# Altium PCB USB_C_programmer_board.PcbDoc
Units mm, origin at the board's own origin, x right, y up, seen from the top; angles counter-clockwise.
Board outline 24.98 x 15 mm, 2 copper layers (Top Layer, Bottom Layer), stack 1.571 mm thick; 6 components, 7 nets, 30 pads, 2 vias.
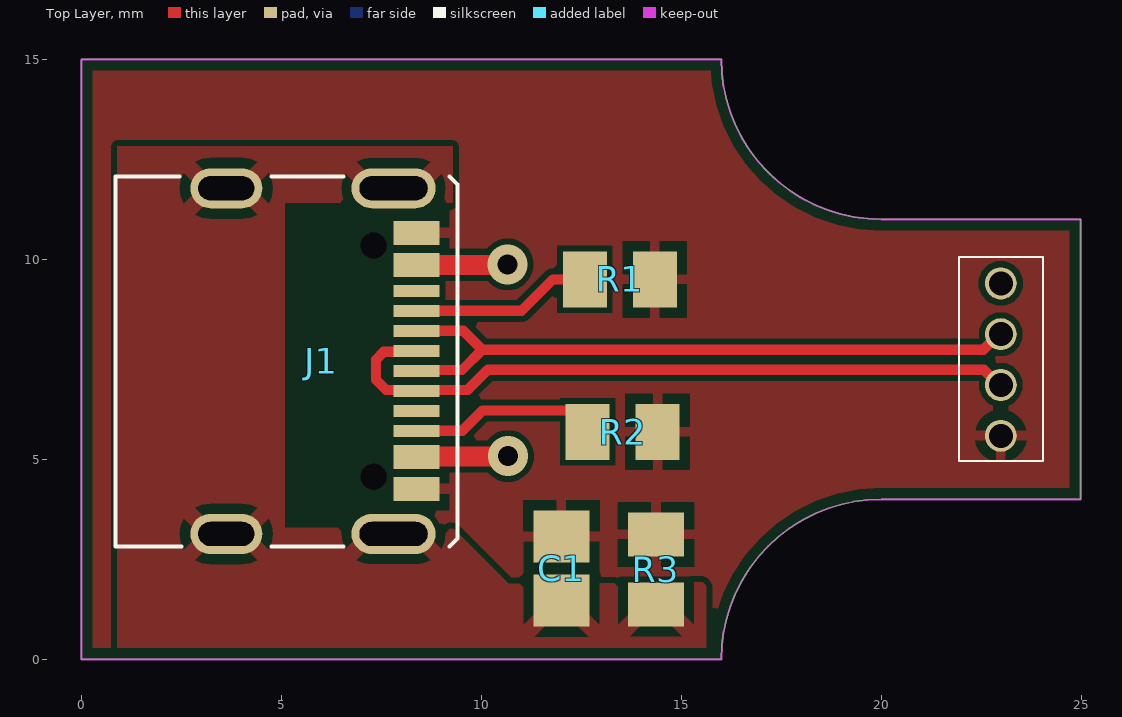
[diagram p0: Top Layer view]
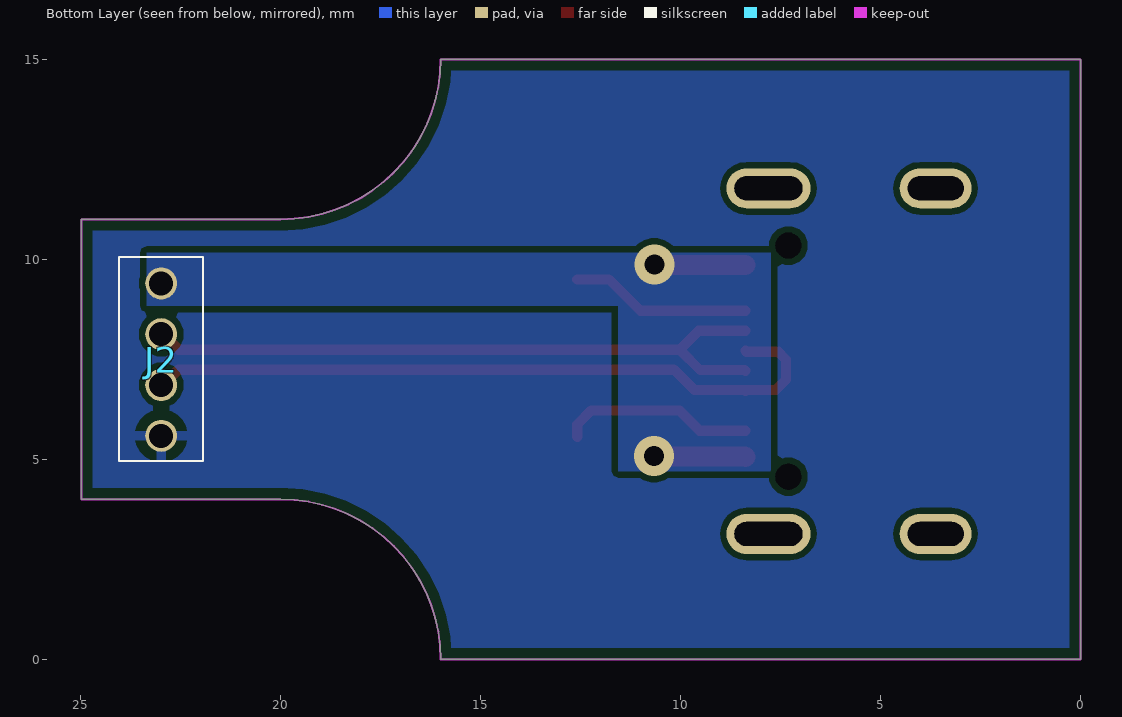
[diagram p1: Bottom Layer view, seen from below]
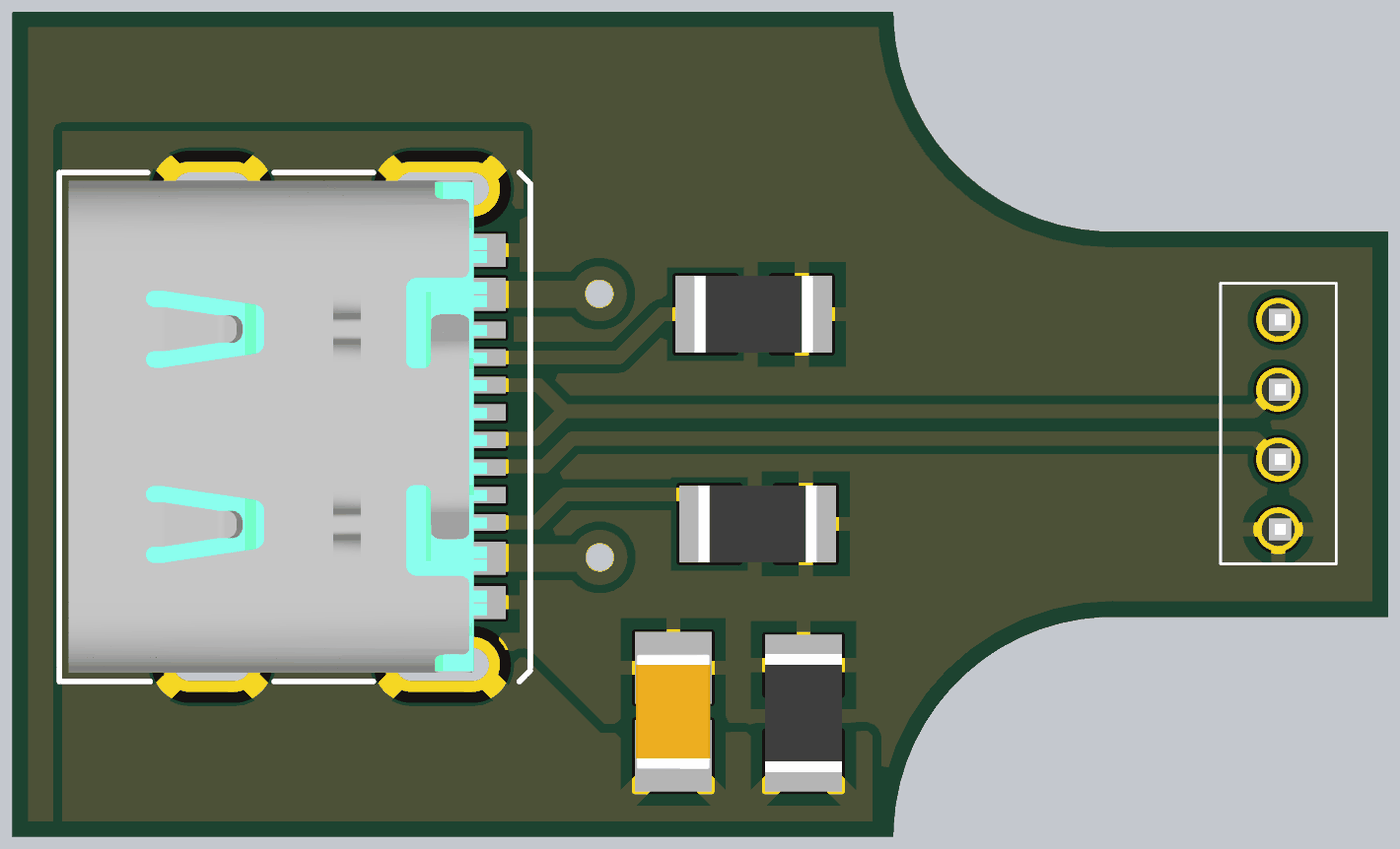
[diagram p2: 3D render of the assembled board from above, using the file's embedded part models]

## Layer stack, top to bottom
Top Solder: solder mask 0.0102, Solder Resist, Dk 3.5
Top Layer: signal copper 0.0356
Dielectric 1: dielectric 1.5, FR-4, Dk 4.8
Bottom Layer: signal copper 0.0356
Bottom Solder: solder mask 0.0102, Solder Resist, Dk 3.5

## Board outline
0,0 0,14.986 0.014,15 16,15 ccw(c20,15) 20,11 24.984,11 24.984,4 20,4 ccw(c20,0) 16,0

## Design rules (kind name [scope] priority, off if disabled: settings)
Clearance Clearance_1 [OnMid vs OnMid] p1: gap=0.15 ignorepadtopadclearanceinfootprint=FALSE except(0.2: Arc-Arc Arc-Track Arc-Text Track-Track Track-Text Text-Text; 0.254: Hole-Hole) sourcerule=45 cellrowname=All cellrowtype=0 cellcolname=All cellcoltype=0 innerlayers=TRUE
Clearance Clearance_2 [(ExistsOnLayer('Top Layer') Or ExistsOnLayer('Bottom Layer')) vs (ExistsOnLayer('Top Layer') Or ExistsOnLayer('Bottom Layer'))] p2: gap=0.15 ignorepadtopadclearanceinfootprint=FALSE except(0.2: Arc-Arc Arc-Track Arc-Text Track-Track Track-Text Text-Text; 0.254: Hole-Hole) sourcerule=45 cellrowname=All cellrowtype=0 cellcolname=All cellcoltype=0 outerlayers=TRUE
Clearance [All] p3: gap=0.254 ignorepadtopadclearanceinfootprint=FALSE ismatrix=TRUE
MinimumSolderMaskSliver [All] p1: minsoldermaskwidth=0
PolygonConnect PolygonConnectStyle_3 [isVia] p1: connectstyle=Direct reliefconductorwidth=0.254 reliefentries=2 polygonreliefangle="0 Angle" airgapwidth=0.254
PolygonConnect PolygonConnectStyle_2 [IsNamedPolygon('5V_BOTTOM')] p2: connectstyle=Direct reliefconductorwidth=0.254 reliefentries=2 polygonreliefangle="0 Angle" airgapwidth=0.254
PolygonConnect PolygonConnectStyle_1 [IsNamedPolygon('EARTH_POUR')] p3: connectstyle=Relief reliefconductorwidth=0.4 reliefentries=4 polygonreliefangle="45 Angle" airgapwidth=0.254
PolygonConnect [All] p4: connectstyle=Relief reliefconductorwidth=0.254 reliefentries=4 polygonreliefangle="90 Angle" airgapwidth=0.254
RoutingVias RoutingViaStyle_1 [All] p1: holewidth=0.5 width=1 viastyle="Through Hole" minholewidth=0.3 minwidth=0.6 maxholewidth=1 maxwidth=2
RoutingVias [All] p2: holewidth=0.711 width=1.27 viastyle="Through Hole" minholewidth=0.711 minwidth=1.27 maxholewidth=0.711 maxwidth=1.27
SilkToSolderMaskClearance [IsPad] p1: minsilkscreentomaskgap=0 clearancetoexposedcopper=TRUE
SolderMaskExpansion SolderMaskExpansion_1 [IsVia] p1: expansion=0.102 istentingtop=TRUE useseparateexpansions=TRUE expansionbottom=0.102 istentingbottom=TRUE
SolderMaskExpansion [All] p2: expansion=0.05 istentingtop=FALSE
SupplyNets "Schematic Supply Nets_2" [InNet('5V')] p1: voltage=0.000
SupplyNets "Schematic Supply Nets_1" [InNet('Earth')] p2: voltage=0.000
SupplyNets "Schematic Supply Nets" [InNet('GND')] p3: voltage=0.000
Width MaxMinWidth_1 [All] p1: maxlimit=3 minlimit=0.15 preferedwidth=0.2 minimp=50.000000 maximp=50.000000 favimp=50.000000
Width [All] p2: maxlimit=0.254 minlimit=0.254 preferedwidth=0.254
28 further rules are at their usual default settings.

## Components (designator, comment, footprint, x,y, rotation, side; value= is the part's Value field where it differs from the comment)
C1 "C_0805_0.1uF" CAP_0805 12.002,2.274 r90 top
J1 "USB_C_CONNECTOR" USB_C_CONNECTOR-Footprint-1 7.807,11.775 r270 top
J2 "4PIN_HEADER_1.27" 4PIN_HEADER_1.27-Footprint-1 22.987,5.588 r90 bottom
R1 "R_0805_5k1" 0805_RES 13.462,9.499 r180 top
R2 "R_0805_5k1" 0805_RES 13.533,5.689 r180 top
R3 "R_0805_1M" 0805_RES 14.367,2.249 r270 top

## Footprints (in the part's own frame and the unit in brackets; to place one, negate y for a bottom-side part, rotate by r counter-clockwise, add the part's x,y. Pads: shape width x height; smd on the part's side, far side on the other; paste and mask are expansions set on the pad)
4PIN_HEADER_1.27-Footprint-1 [mm]
  round 0.8 hole 0.6: 1(0,0) 2(1.27,0) 3(2.54,0) 4(3.81,0)
  silkscreen extent -0.63,-1.05 4.47,1.05, body extent -0.64,-1.02 4.44,1.08, height 4
0805_RES [mm]
  rect 1.1x1.4 smd: 1(-0.875,0) 2(0.875,0)
  body extent -1.07,-0.7 1.07,0.7, height 0.65
CAP_0805 [mm]
  rect 1.3x1.4 smd: 1(-0.8,0) 2(0.8,0)
  body extent -1.05,-0.67 1.05,0.67, height 1.35
USB_C_CONNECTOR-Footprint-1 [mm]
  round 0 hole 0.65 unplated mask+0.1: 16(1.43,-0.5) 16(7.21,-0.5)
  rect 0.6x1.15 smd: A1_B12(1.112,0.575) A4_B9(1.912,0.575) A9_B4(6.712,0.575) A12_B1(7.512,0.575)
  rect 0.3x1.15 smd: A5(3.062,0.575) A6(4.062,0.575) A7(4.562,0.575) A8(5.562,0.575) B5(6.062,0.575) B6(5.062,0.575) B7(3.562,0.575) B8(2.562,0.575)
  oval 1x2.1 hole 0.6 slot 1.7 at 90 deg mask+0.2: MH1(0,0) MH4(8.64,0)
  oval 1x1.8 hole 0.6 slot 1.4 at 90 deg mask+0.2: MH2(0,-4.18) MH3(8.64,-4.18)
  silkscreen extent -0.3,-6.95 8.95,1.6, body extent -0.15,-6.78 8.79,0.82, height 3.38

## Part data
C1: library part CMP-00002-4, JLC Part Number=C28233, Distributor=Mouser, Order Code=581-08051C104KAT4A
J1: library part CMP-00013-4, "USB2.0, Type C, Top Mount, Ch 1.68MM, Dual Row SMT / Tap/rl", JLC Part Number=C2831450, Distributor=Mouser, Order Code=538-217179-0001
J2: library part CMP-00049-2, Distributor=Mouser, Order Code=855-M50-3530442
R1 R2: library part CMP-00014-4, JLC Part Number=C27834, Distributor=Mouser, Order Code=71-CRCW0805-5.1K-E3
R3: library part CMP-00037-4, JLC Part Number=C131391, Distributor=Mouser, Order Code=667-ERJ-P06J105V

## Via types
v1: diameter 1, hole 0.5, Top Layer to Bottom Layer, tented both sides, 2 vias

## Nets (pads, with @x,y where several pads share a name; then routed paths per layer and width w, separated by ;. In a path a pad name is that pad's centre, name@x,y a point inside that pad or via, vN(x,y) a via of type N, cw(c..) or ccw(c..) an arc to the next point about the centre after c; other vN are vias at no path point)
5V: J1.A4_B9 J1.A9_B4 J2.4 | length 4.6
  Top Layer w0.5: J1.A9_B4 8.391,5.071 10.659,5.071 v1(10.668,5.08) ; J1.A4_B9 v1@10.651,9.863
  other v1: 10.659,9.871
Earth: C1.1 J1.MH1 J1.MH2 J1.MH3 J1.MH4 R3.2
GND: C1.2 J1.A1_B12 J1.A12_B1 J2.1 R1.1 R2.1 R3.1
NetJ1_A5: J1.A5 R1.2 | length 4.5
  Top Layer w0.254: J1.A5 11.007,8.713 11.793,9.499 R1.2
NetJ1_B5: J1.B5 R2.2 | length 4.9
  Top Layer w0.254: J1.B5 9.523,5.713 10.033,6.223 12.235,6.223 12.587,5.871 R2.2@12.587,5.562
USB_DN: J1.A7 J1.B7 J2.3 | length 16.8
  Top Layer w0.254: J1.A7 8.403,7.234 9.516,7.234 10.022,7.74 ; J1.B7 9.549,8.213 10.022,7.74 ; J2.3 22.935,8.128 22.547,7.74 10.022,7.74
USB_DP: J1.A6 J1.B6 J2.2 | length 17.7
  Top Layer w0.254: J1.A6 8.359,7.69 7.563,7.69 7.366,7.493 7.366,6.985 7.615,6.736 8.359,6.736 J1.B6 8.405,6.736 9.66,6.736 10.163,7.239 22.565,7.239 22.946,6.858 J2.2
pads on no net: J1.16 J1.A8 J1.B8

## Polygon pours and split planes (outlines as drawn)
GND on Top Layer "TOP_GND" (solid, remove dead copper, pour order 1): 0,0 25,0 24.984,11 25,14.978 20.989,14.982 0,15
Earth on Top Layer "EARTH_POUR" (solid, pour order 0): 9.285,11.417 9.285,12.827 0.903,12.827 0.903,0.254 15.621,0.254 15.621,1.925 10.686,1.888 9.285,3.289 5.08,3.289 5.08,11.417 6.364,11.417
5V on Bottom Layer "5V_BOTTOM" (solid, pour order 3): 11.055,10.16 23.352,10.16 23.352,8.836 11.557,8.836 11.557,4.699 7.747,4.699 7.747,10.16
GND on Bottom Layer "TOP_GND" (solid, remove dead copper, pour order 4): 0,0 25,0 25,15 0,15

## Keep-outs
Keep-Out Layer:
  the board outline again, w0.05

## Silkscreen, mask and mechanical layers (free items; w line width, h text height)
Mechanical 1:
  the board outline again, w0.05